# Altium PCB DSP6748_F.PcbDoc (part 11 of 16)
Units mil, origin at the board's own origin, x right, y up, seen from the top; angles counter-clockwise.
Board outline 8188.98 x 4055.12 mil, 4 copper layers (Top Layer, GND, VCC, Bottom Layer); 409 components, 262 nets, 1424 pads, 350 vias.
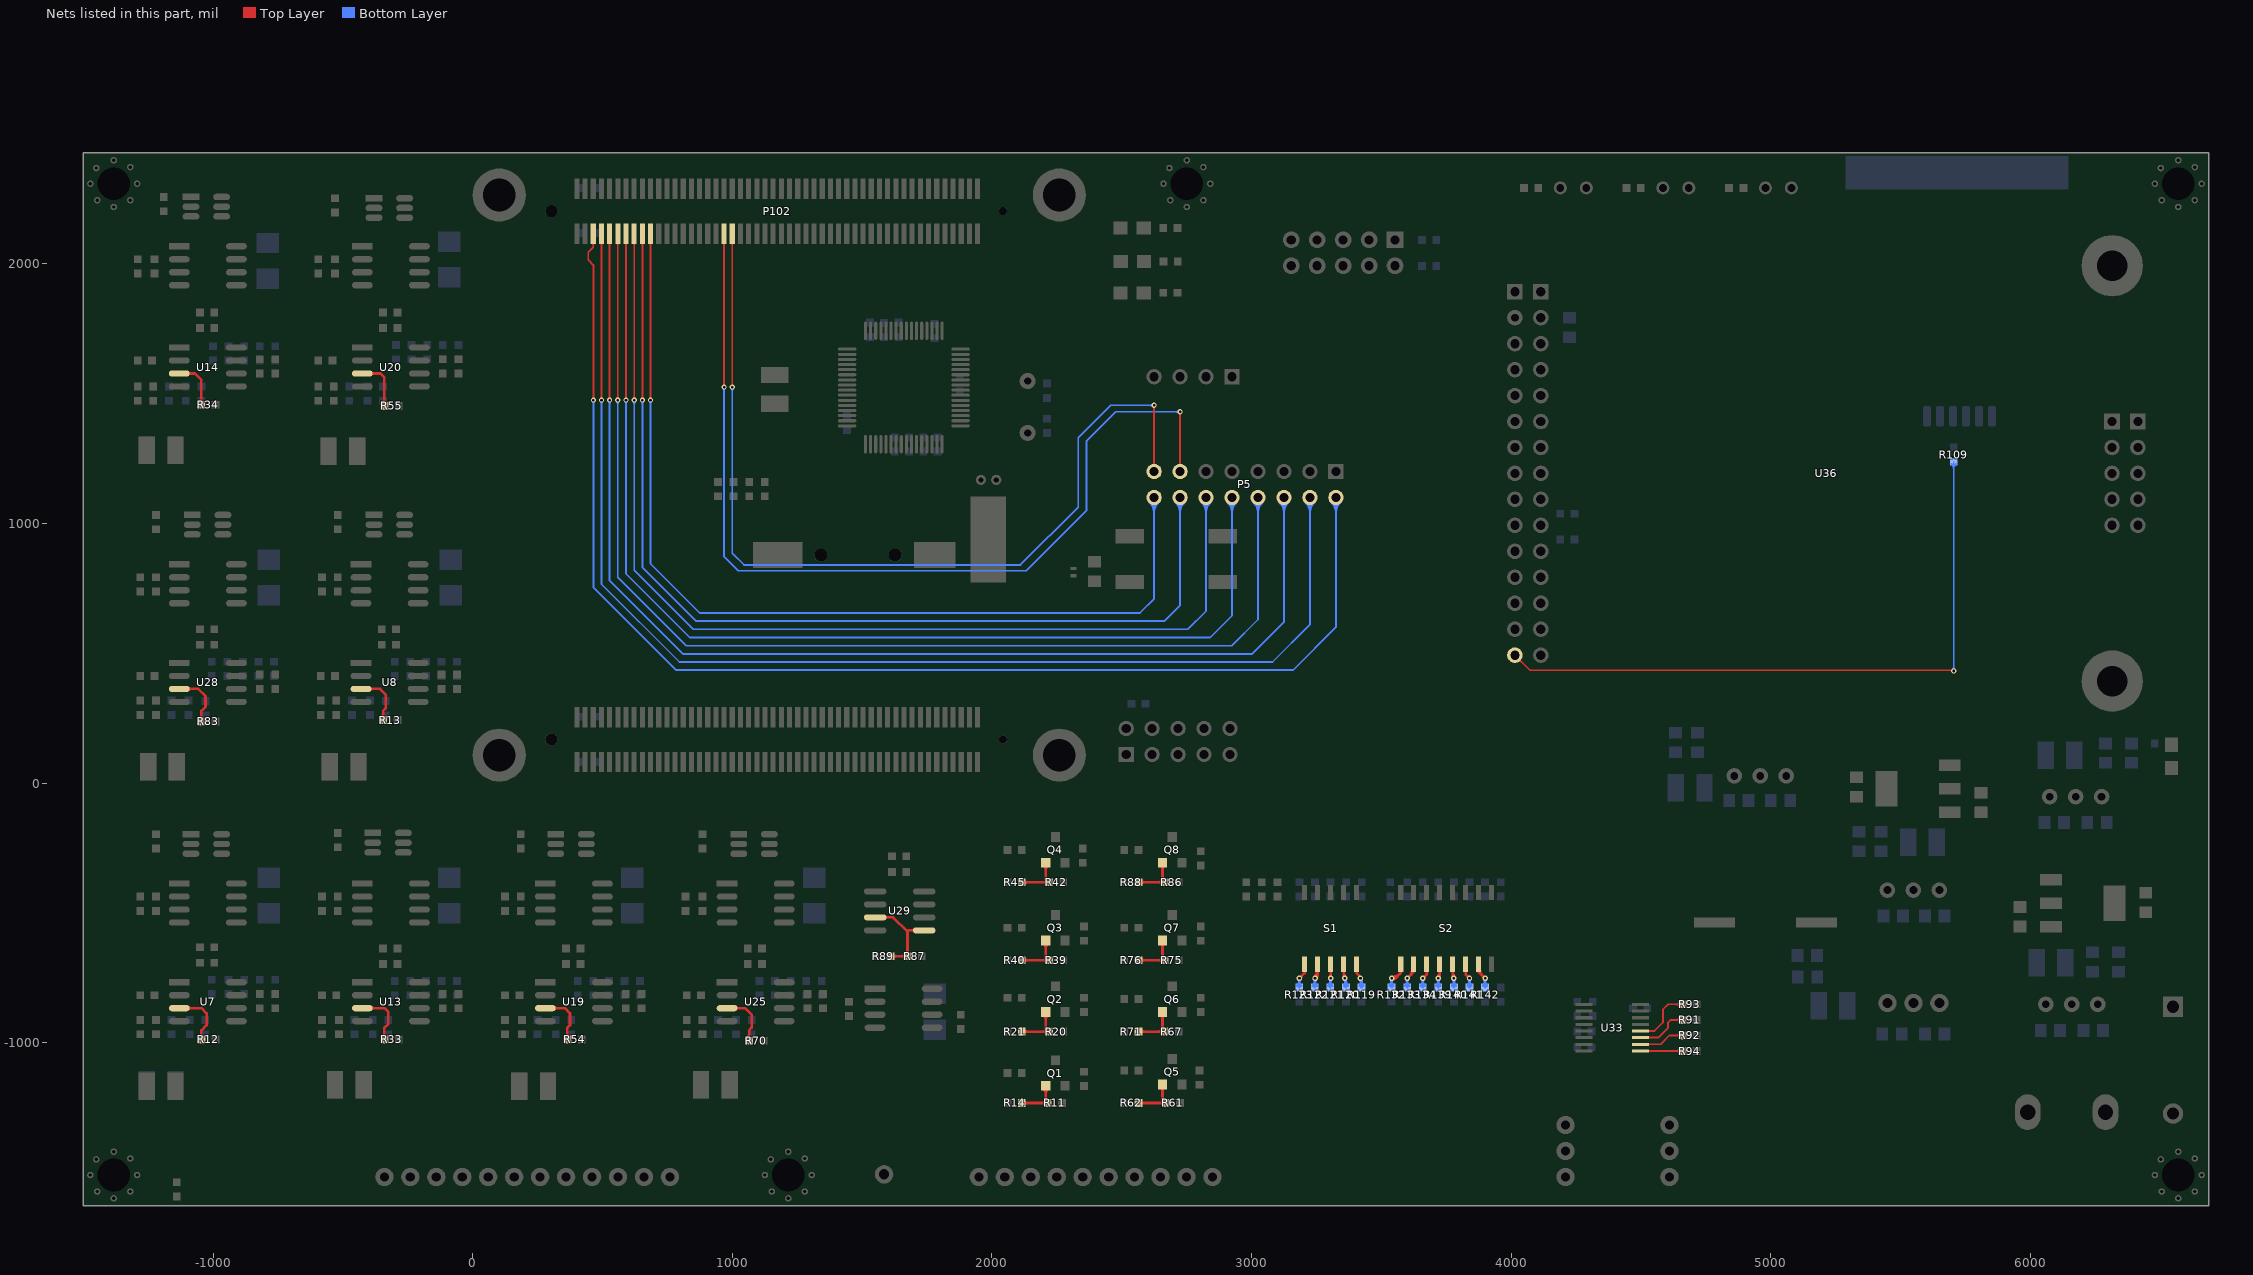
[diagram p13: the nets of this part, all layers, seen from the top]

## Via types
v1: diameter 21, hole 10, Top Layer to Bottom Layer, 244 vias
v2: diameter 20, hole 10, Top Layer to Bottom Layer, 84 vias
v3: diameter 32, hole 16, Top Layer to Bottom Layer, 11 vias
v4: diameter 24, hole 12, Top Layer to Bottom Layer, 7 vias
v5: diameter 39.37, hole 19.68, Top Layer to Bottom Layer, 3 vias
v6: diameter 30, hole 15, Top Layer to Bottom Layer, 1 vias

## Nets (pads, with @x,y where several pads share a name; then routed paths per layer and width w, separated by ;. In a path a pad name is that pad's centre, name@x,y a point inside that pad or via, vN(x,y) a via of type N, cw(c..) or ccw(c..) an arc to the next point about the centre after c; other vN are vias at no path point) (continued)
NetP5_7: P5.7 P102.37 | length 3760.8
  Top Layer w7: v2@963.91,1529.6 ccw(c952.82,1540.69) 968.51,1540.69 ccw(c984.2,1540.69) v2@973.11,1529.6 ; P102.37@964.02,2081.9 cw(c953.19,2071.07) 968.51,2071.07 cw(c983.83,2071.07) P102.37@973,2081.9 ; v2(968.51,1525) P102.37@968.51,2115.91 ; P5.7@2725,1200 v2(2725,1430)
  Bottom Layer w7: v2@963.91,1520.4 cw(c952.82,1509.31) 968.51,1509.31 cw(c984.2,1509.31) v2@973.11,1520.4 ; v2(968.51,1525) 968.51,871.96 1022.73,817.73 2132.27,817.73 2364.02,1049.49 2364.02,1316.28 2477.74,1430 v2(2725,1430) ; v2@2720.4,1425.4 ccw(c2709.31,1414.31) 2709.31,1430 ccw(c2709.31,1445.69) v2@2720.4,1434.6
NetP5_8: P5.8 P102.39 | length 3613.9
  Top Layer w7: P102.39@995.51,2081.9 cw(c984.68,2071.07) 1000,2071.07 cw(c1015.32,2071.07) P102.39@1004.49,2081.9 ; v2(1000,1525) P102.39@1000,2115.91 ; P5.8@2625,1200 v2(2625,1455)
  Bottom Layer w7: v2@995.4,1520.4 cw(c984.31,1509.31) 1000,1509.31 cw(c1015.69,1509.31) v2@1004.6,1520.4 ; v2(1000,1525) 1000,885 1045,840 2110,840 2332.53,1062.53 2332.53,1329.32 2458.21,1455 v2(2625,1455) ; v2@2620.4,1450.4 ccw(c2609.31,1439.31) 2609.31,1455 ccw(c2609.31,1470.69) v2@2620.4,1459.6
NetP5_9: P5.9 P102.5 | length 5158.5
  Top Layer w7: P102.5@460.08,2081.9 cw(c449.25,2071.07) 464.57,2071.07 cw(c479.89,2071.07) P102.5@469.06,2081.9 ; P102.5@464.57,2115.91 464.57,2064.57 445,2045 445,2015 465,1995 v2(465,1475)
  Bottom Layer w7: v2@460.4,1470.4 cw(c449.31,1459.31) 465,1459.31 cw(c480.69,1459.31) v2@469.6,1470.4 ; v2(465,1475) 465,753.82 783.82,435 3160,435 3325,600 P5.9@3325,1100 ; P5.9@3306.6,1081.6 cw(c3262.16,1037.16) 3325,1037.16 cw(c3387.84,1037.16) P5.9@3343.4,1081.6 ; P5.9@3311.55,1086.55 cw(c3279.06,1054.06) 3325,1054.06 cw(c3370.94,1054.06) P5.9@3338.45,1086.55
NetP5_10: P5.10 P102.7 | length 4971.9
  Top Layer w7: P102.7@491.57,2081.9 cw(c480.74,2071.07) 496.06,2071.07 cw(c511.38,2071.07) P102.7@500.55,2081.9 ; v2(496.06,1475) P102.7@496.06,2115.91
  Bottom Layer w7: v2@491.46,1470.4 cw(c480.37,1459.31) 496.06,1459.31 cw(c511.75,1459.31) v2@500.66,1470.4 ; v2(496.06,1475) 496.06,766.68 796.68,466.06 3081.06,466.06 3225,610 P5.10@3225,1100 ; P5.10@3206.6,1081.6 cw(c3162.16,1037.16) 3225,1037.16 cw(c3287.84,1037.16) P5.10@3243.4,1081.6 ; P5.10@3211.55,1086.55 cw(c3179.06,1054.06) 3225,1054.06 cw(c3270.94,1054.06) P5.10@3238.45,1086.55
NetP5_11: P5.11 P102.9 | length 4825.4
  Top Layer w7: v2@522.96,1479.6 ccw(c511.87,1490.69) 527.56,1490.69 ccw(c543.25,1490.69) v2@532.16,1479.6 ; P102.9@523.07,2081.9 cw(c512.24,2071.07) 527.56,2071.07 cw(c542.88,2071.07) P102.9@532.05,2081.9 ; v2(527.56,1475) P102.9@527.56,2115.91
  Bottom Layer w7: v2@522.96,1470.4 cw(c511.87,1459.31) 527.56,1459.31 cw(c543.25,1459.31) v2@532.16,1470.4 ; v2(527.56,1475) 527.56,779.73 809.73,497.56 3002.56,497.56 3125,620 P5.11@3125,1100 ; P5.11@3106.6,1081.6 cw(c3062.16,1037.16) 3125,1037.16 cw(c3187.84,1037.16) P5.11@3143.4,1081.6 ; P5.11@3111.55,1086.55 cw(c3079.06,1054.06) 3125,1054.06 cw(c3170.94,1054.06) P5.11@3138.45,1086.55
NetP5_12: P5.12 P102.11 | length 4654.3
  Top Layer w7: v2@554.46,1479.6 ccw(c543.37,1490.69) 559.06,1490.69 ccw(c574.75,1490.69) v2@563.66,1479.6 ; P102.11@554.57,2081.9 cw(c543.74,2071.07) 559.06,2071.07 cw(c574.38,2071.07) P102.11@563.55,2081.9 ; v2(559.06,1475) P102.11@559.06,2115.91
  Bottom Layer w7: v2@554.46,1470.4 cw(c543.37,1459.31) 559.06,1459.31 cw(c574.75,1459.31) v2@563.66,1470.4 ; v2(559.06,1475) 559.06,792.78 822.78,529.06 2924.06,529.06 3025,630 P5.12@3025,1100 ; P5.12@3006.6,1081.6 cw(c2962.16,1037.16) 3025,1037.16 cw(c3087.84,1037.16) P5.12@3043.4,1081.6 ; P5.12@3011.55,1086.55 cw(c2979.06,1054.06) 3025,1054.06 cw(c3070.94,1054.06) P5.12@3038.45,1086.55
NetP5_13: P5.13 P102.13 | length 4480.3
  Top Layer w7: v2@585.95,1479.6 ccw(c574.86,1490.69) 590.55,1490.69 ccw(c606.24,1490.69) v2@595.15,1479.6 ; P102.13@586.06,2081.9 cw(c575.23,2071.07) 590.55,2071.07 cw(c605.87,2071.07) P102.13@595.04,2081.9 ; v2(590.55,1475) P102.13@590.55,2115.91
  Bottom Layer w7: v2@585.95,1470.4 cw(c574.86,1459.31) 590.55,1459.31 cw(c606.24,1459.31) v2@595.15,1470.4 ; v2(590.55,1475) 590.55,805.82 835.82,560.55 2840.55,560.55 2925,645 P5.13@2925,1100 ; P5.13@2906.6,1081.6 cw(c2862.16,1037.16) 2925,1037.16 cw(c2987.84,1037.16) P5.13@2943.4,1081.6 ; P5.13@2911.55,1086.55 cw(c2879.06,1054.06) 2925,1054.06 cw(c2970.94,1054.06) P5.13@2938.45,1086.55
NetP5_14: P5.14 P102.15 | length 4304.8
  Top Layer w7: v2@617.45,1479.6 ccw(c606.36,1490.69) 622.05,1490.69 ccw(c637.74,1490.69) v2@626.65,1479.6 ; P102.15@617.56,2081.9 cw(c606.73,2071.07) 622.05,2071.07 cw(c637.37,2071.07) P102.15@626.54,2081.9 ; v2(622.05,1475) P102.15@622.05,2115.91
  Bottom Layer w7: v2@617.45,1470.4 cw(c606.36,1459.31) 622.05,1459.31 cw(c637.74,1459.31) v2@626.65,1470.4 ; v2(622.05,1475) 622.05,818.87 848.87,592.05 2754.53,592.05 2825,662.52 P5.14@2825,1100 ; P5.14@2806.6,1081.6 cw(c2762.16,1037.16) 2825,1037.16 cw(c2887.84,1037.16) P5.14@2843.4,1081.6 ; P5.14@2811.55,1086.55 cw(c2779.06,1054.06) 2825,1054.06 cw(c2870.94,1054.06) P5.14@2838.45,1086.55
NetP5_15: P5.15 P102.17 | length 4126.4
  Top Layer w7: v2@648.94,1479.6 ccw(c637.85,1490.69) 653.54,1490.69 ccw(c669.23,1490.69) v2@658.14,1479.6 ; P102.17@649.05,2081.9 cw(c638.22,2071.07) 653.54,2071.07 cw(c668.86,2071.07) P102.17@658.03,2081.9 ; v2(653.54,1475) P102.17@653.54,2115.91
  Bottom Layer w7: v2@648.94,1470.4 cw(c637.85,1459.31) 653.54,1459.31 cw(c669.23,1459.31) v2@658.14,1470.4 ; v2(653.54,1475) 653.54,831.91 861.91,623.54 2663.54,623.54 2725,685 P5.15@2725,1100 ; P5.15@2706.6,1081.6 cw(c2662.16,1037.16) 2725,1037.16 cw(c2787.84,1037.16) P5.15@2743.4,1081.6 ; P5.15@2711.55,1086.55 cw(c2679.06,1054.06) 2725,1054.06 cw(c2770.94,1054.06) P5.15@2738.45,1086.55
NetP5_16: P5.16 P102.19 | length 3921.9
  Top Layer w7: P102.19@680.55,2081.9 cw(c669.72,2071.07) 685.04,2071.07 cw(c700.36,2071.07) P102.19@689.53,2081.9 ; v2(685.04,1475) P102.19@685.04,2115.91
  Bottom Layer w7: v2@680.44,1470.4 cw(c669.35,1459.31) 685.04,1459.31 cw(c700.73,1459.31) v2@689.64,1470.4 ; v2(685.04,1475) 685.04,844.96 874.96,655.04 2570.04,655.04 2625,710 P5.16@2625,1100 ; P5.16@2606.6,1081.6 cw(c2562.16,1037.16) 2625,1037.16 cw(c2687.84,1037.16) P5.16@2643.4,1081.6 ; P5.16@2611.55,1086.55 cw(c2579.06,1054.06) 2625,1054.06 cw(c2670.94,1054.06) P5.16@2638.45,1086.55
NetQ1_1: Q1.1 R11.1 R14.2 | length 541.1
  Top Layer w10: R14.2@2114.81,-1232.48 R11.1@2214.81,-1232.48 2207.41,-1225.08 Q1.1@2207.41,-1166.69 ; R14.2@2121.88,-1239.55 cw(c2138.95,-1256.62) 2138.95,-1232.48 ; R14.2@2121.88,-1239.55 cw(c2138.95,-1256.62) 2138.95,-1232.48 ; R14.2@2121.88,-1239.55 cw(c2138.95,-1256.62) 2138.95,-1232.48 ; R14.2@2121.88,-1225.41 ccw(c2138.95,-1208.34) 2138.95,-1232.48 ; R14.2@2121.88,-1225.41 ccw(c2138.95,-1208.34) 2138.95,-1232.48 ; R14.2@2121.88,-1225.41 ccw(c2138.95,-1208.34) 2138.95,-1232.48 ; 2190.67,-1232.48 cw(c2190.67,-1256.62) R11.1@2207.74,-1239.55 ; 2190.67,-1232.48 ccw(c2190.67,-1208.34) R11.1@2207.74,-1225.41 ; 2190.67,-1232.48 cw(c2190.67,-1256.62) R11.1@2207.74,-1239.55 ; 2190.67,-1232.48 ccw(c2190.67,-1208.34) R11.1@2207.74,-1225.41 ; 2190.67,-1232.48 ccw(c2190.67,-1208.34) R11.1@2207.74,-1225.41 ; 2190.67,-1232.48 cw(c2190.67,-1256.62) R11.1@2207.74,-1239.55 ; Q1.1@2198.42,-1176.67 cw(c2176.71,-1198.38) 2207.41,-1198.38 ; Q1.1@2198.42,-1176.67 cw(c2176.71,-1198.38) 2207.41,-1198.38 ; Q1.1@2198.42,-1176.67 cw(c2176.71,-1198.38) 2207.41,-1198.38 ; 2207.41,-1198.38 cw(c2238.11,-1198.38) Q1.1@2216.4,-1176.67 ; 2207.41,-1198.38 cw(c2238.11,-1198.38) Q1.1@2216.4,-1176.67 ; 2207.41,-1198.38 cw(c2238.11,-1198.38) Q1.1@2216.4,-1176.67
NetQ2_1: Q2.1 R20.1 R21.2 | length 558.1
  Top Layer w10: R21.2@2114.81,-957.48 R20.1@2219.81,-957.48 2207.41,-945.08 Q2.1@2207.41,-881.69 ; R21.2@2121.88,-964.55 cw(c2138.95,-981.62) 2138.95,-957.48 ; R21.2@2121.88,-964.55 cw(c2138.95,-981.62) 2138.95,-957.48 ; R21.2@2121.88,-964.55 cw(c2138.95,-981.62) 2138.95,-957.48 ; R21.2@2121.88,-950.41 ccw(c2138.95,-933.34) 2138.95,-957.48 ; R21.2@2121.88,-950.41 ccw(c2138.95,-933.34) 2138.95,-957.48 ; R21.2@2121.88,-950.41 ccw(c2138.95,-933.34) 2138.95,-957.48 ; 2195.67,-957.48 cw(c2195.67,-981.62) R20.1@2212.74,-964.55 ; 2195.67,-957.48 ccw(c2195.67,-933.34) R20.1@2212.74,-950.41 ; 2195.67,-957.48 cw(c2195.67,-981.62) R20.1@2212.74,-964.55 ; 2195.67,-957.48 ccw(c2195.67,-933.34) R20.1@2212.74,-950.41 ; 2195.67,-957.48 ccw(c2195.67,-933.34) R20.1@2212.74,-950.41 ; 2195.67,-957.48 cw(c2195.67,-981.62) R20.1@2212.74,-964.55 ; Q2.1@2198.42,-891.67 cw(c2176.71,-913.38) 2207.41,-913.38 ; Q2.1@2198.42,-891.67 cw(c2176.71,-913.38) 2207.41,-913.38 ; Q2.1@2198.42,-891.67 cw(c2176.71,-913.38) 2207.41,-913.38 ; 2207.41,-913.38 cw(c2238.11,-913.38) Q2.1@2216.4,-891.67 ; 2207.41,-913.38 cw(c2238.11,-913.38) Q2.1@2216.4,-891.67 ; 2207.41,-913.38 cw(c2238.11,-913.38) Q2.1@2216.4,-891.67
NetQ3_1: Q3.1 R39.1 R40.2 | length 558.1
  Top Layer w10: R40.2@2114.81,-682.48 R39.1@2219.81,-682.48 2207.41,-670.08 Q3.1@2207.41,-606.69 ; R40.2@2121.88,-689.55 cw(c2138.95,-706.62) 2138.95,-682.48 ; R40.2@2121.88,-689.55 cw(c2138.95,-706.62) 2138.95,-682.48 ; R40.2@2121.88,-689.55 cw(c2138.95,-706.62) 2138.95,-682.48 ; R40.2@2121.88,-675.41 ccw(c2138.95,-658.34) 2138.95,-682.48 ; R40.2@2121.88,-675.41 ccw(c2138.95,-658.34) 2138.95,-682.48 ; R40.2@2121.88,-675.41 ccw(c2138.95,-658.34) 2138.95,-682.48 ; 2195.67,-682.48 cw(c2195.67,-706.62) R39.1@2212.74,-689.55 ; 2195.67,-682.48 ccw(c2195.67,-658.34) R39.1@2212.74,-675.41 ; 2195.67,-682.48 cw(c2195.67,-706.62) R39.1@2212.74,-689.55 ; 2195.67,-682.48 ccw(c2195.67,-658.34) R39.1@2212.74,-675.41 ; 2195.67,-682.48 ccw(c2195.67,-658.34) R39.1@2212.74,-675.41 ; 2195.67,-682.48 cw(c2195.67,-706.62) R39.1@2212.74,-689.55 ; Q3.1@2198.42,-616.67 cw(c2176.71,-638.38) 2207.41,-638.38 ; Q3.1@2198.42,-616.67 cw(c2176.71,-638.38) 2207.41,-638.38 ; Q3.1@2198.42,-616.67 cw(c2176.71,-638.38) 2207.41,-638.38 ; 2207.41,-638.38 cw(c2238.11,-638.38) Q3.1@2216.4,-616.67 ; 2207.41,-638.38 cw(c2238.11,-638.38) Q3.1@2216.4,-616.67 ; 2207.41,-638.38 cw(c2238.11,-638.38) Q3.1@2216.4,-616.67
NetQ4_1: Q4.1 R42.1 R45.2 | length 558.1
  Top Layer w10: R45.2@2114.81,-382.48 R42.1@2219.81,-382.48 2207.41,-370.08 Q4.1@2207.41,-306.69 ; R45.2@2121.88,-389.55 cw(c2138.95,-406.62) 2138.95,-382.48 ; R45.2@2121.88,-389.55 cw(c2138.95,-406.62) 2138.95,-382.48 ; R45.2@2121.88,-389.55 cw(c2138.95,-406.62) 2138.95,-382.48 ; R45.2@2121.88,-375.41 ccw(c2138.95,-358.34) 2138.95,-382.48 ; R45.2@2121.88,-375.41 ccw(c2138.95,-358.34) 2138.95,-382.48 ; R45.2@2121.88,-375.41 ccw(c2138.95,-358.34) 2138.95,-382.48 ; 2195.67,-382.48 cw(c2195.67,-406.62) R42.1@2212.74,-389.55 ; 2195.67,-382.48 ccw(c2195.67,-358.34) R42.1@2212.74,-375.41 ; 2195.67,-382.48 cw(c2195.67,-406.62) R42.1@2212.74,-389.55 ; 2195.67,-382.48 ccw(c2195.67,-358.34) R42.1@2212.74,-375.41 ; 2195.67,-382.48 ccw(c2195.67,-358.34) R42.1@2212.74,-375.41 ; 2195.67,-382.48 cw(c2195.67,-406.62) R42.1@2212.74,-389.55 ; Q4.1@2198.42,-316.67 cw(c2176.71,-338.38) 2207.41,-338.38 ; Q4.1@2198.42,-316.67 cw(c2176.71,-338.38) 2207.41,-338.38 ; Q4.1@2198.42,-316.67 cw(c2176.71,-338.38) 2207.41,-338.38 ; 2207.41,-338.38 cw(c2238.11,-338.38) Q4.1@2216.4,-316.67 ; 2207.41,-338.38 cw(c2238.11,-338.38) Q4.1@2216.4,-316.67 ; 2207.41,-338.38 cw(c2238.11,-338.38) Q4.1@2216.4,-316.67
NetQ5_1: Q5.1 R61.1 R62.2 | length 553.1
  Top Layer w10: R62.2@2564.81,-1232.48 R61.1@2669.81,-1232.48 2657.41,-1220.08 Q5.1@2657.41,-1161.69 ; R62.2@2571.88,-1239.55 cw(c2588.95,-1256.62) 2588.95,-1232.48 ; R62.2@2571.88,-1239.55 cw(c2588.95,-1256.62) 2588.95,-1232.48 ; R62.2@2571.88,-1239.55 cw(c2588.95,-1256.62) 2588.95,-1232.48 ; R62.2@2571.88,-1225.41 ccw(c2588.95,-1208.34) 2588.95,-1232.48 ; R62.2@2571.88,-1225.41 ccw(c2588.95,-1208.34) 2588.95,-1232.48 ; R62.2@2571.88,-1225.41 ccw(c2588.95,-1208.34) 2588.95,-1232.48 ; 2645.67,-1232.48 cw(c2645.67,-1256.62) R61.1@2662.74,-1239.55 ; 2645.67,-1232.48 ccw(c2645.67,-1208.34) R61.1@2662.74,-1225.41 ; 2645.67,-1232.48 cw(c2645.67,-1256.62) R61.1@2662.74,-1239.55 ; 2645.67,-1232.48 ccw(c2645.67,-1208.34) R61.1@2662.74,-1225.41 ; 2645.67,-1232.48 ccw(c2645.67,-1208.34) R61.1@2662.74,-1225.41 ; 2645.67,-1232.48 cw(c2645.67,-1256.62) R61.1@2662.74,-1239.55 ; Q5.1@2648.42,-1171.67 cw(c2626.71,-1193.38) 2657.41,-1193.38 ; Q5.1@2648.42,-1171.67 cw(c2626.71,-1193.38) 2657.41,-1193.38 ; Q5.1@2648.42,-1171.67 cw(c2626.71,-1193.38) 2657.41,-1193.38 ; 2657.41,-1193.38 cw(c2688.11,-1193.38) Q5.1@2666.4,-1171.67 ; 2657.41,-1193.38 cw(c2688.11,-1193.38) Q5.1@2666.4,-1171.67 ; 2657.41,-1193.38 cw(c2688.11,-1193.38) Q5.1@2666.4,-1171.67
NetQ6_1: Q6.1 R67.1 R71.2 | length 546.1
  Top Layer w10: R71.2@2564.81,-957.48 R67.1@2664.81,-957.48 2657.41,-950.08 Q6.1@2657.41,-886.69 ; R71.2@2571.88,-964.55 cw(c2588.95,-981.62) 2588.95,-957.48 ; R71.2@2571.88,-964.55 cw(c2588.95,-981.62) 2588.95,-957.48 ; R71.2@2571.88,-964.55 cw(c2588.95,-981.62) 2588.95,-957.48 ; R71.2@2571.88,-950.41 ccw(c2588.95,-933.34) 2588.95,-957.48 ; R71.2@2571.88,-950.41 ccw(c2588.95,-933.34) 2588.95,-957.48 ; R71.2@2571.88,-950.41 ccw(c2588.95,-933.34) 2588.95,-957.48 ; 2640.67,-957.48 cw(c2640.67,-981.62) R67.1@2657.74,-964.55 ; 2640.67,-957.48 ccw(c2640.67,-933.34) R67.1@2657.74,-950.41 ; 2640.67,-957.48 cw(c2640.67,-981.62) R67.1@2657.74,-964.55 ; 2640.67,-957.48 ccw(c2640.67,-933.34) R67.1@2657.74,-950.41 ; 2640.67,-957.48 ccw(c2640.67,-933.34) R67.1@2657.74,-950.41 ; 2640.67,-957.48 cw(c2640.67,-981.62) R67.1@2657.74,-964.55 ; Q6.1@2648.42,-891.67 cw(c2626.71,-913.38) 2657.41,-913.38 ; Q6.1@2648.42,-891.67 cw(c2626.71,-913.38) 2657.41,-913.38 ; Q6.1@2648.42,-891.67 cw(c2626.71,-913.38) 2657.41,-913.38 ; 2657.41,-913.38 cw(c2688.11,-913.38) Q6.1@2666.4,-891.67 ; 2657.41,-913.38 cw(c2688.11,-913.38) Q6.1@2666.4,-891.67 ; 2657.41,-913.38 cw(c2688.11,-913.38) Q6.1@2666.4,-891.67
NetQ7_1: Q7.1 R75.1 R76.2 | length 546.1
  Top Layer w10: R76.2@2564.81,-682.48 R75.1@2664.81,-682.48 2657.41,-675.08 Q7.1@2657.41,-611.69 ; R76.2@2571.88,-689.55 cw(c2588.95,-706.62) 2588.95,-682.48 ; R76.2@2571.88,-689.55 cw(c2588.95,-706.62) 2588.95,-682.48 ; R76.2@2571.88,-689.55 cw(c2588.95,-706.62) 2588.95,-682.48 ; R76.2@2571.88,-675.41 ccw(c2588.95,-658.34) 2588.95,-682.48 ; R76.2@2571.88,-675.41 ccw(c2588.95,-658.34) 2588.95,-682.48 ; R76.2@2571.88,-675.41 ccw(c2588.95,-658.34) 2588.95,-682.48 ; 2640.67,-682.48 cw(c2640.67,-706.62) R75.1@2657.74,-689.55 ; 2640.67,-682.48 ccw(c2640.67,-658.34) R75.1@2657.74,-675.41 ; 2640.67,-682.48 cw(c2640.67,-706.62) R75.1@2657.74,-689.55 ; 2640.67,-682.48 ccw(c2640.67,-658.34) R75.1@2657.74,-675.41 ; 2640.67,-682.48 ccw(c2640.67,-658.34) R75.1@2657.74,-675.41 ; 2640.67,-682.48 cw(c2640.67,-706.62) R75.1@2657.74,-689.55 ; Q7.1@2648.42,-616.67 cw(c2626.71,-638.38) 2657.41,-638.38 ; Q7.1@2648.42,-616.67 cw(c2626.71,-638.38) 2657.41,-638.38 ; Q7.1@2648.42,-616.67 cw(c2626.71,-638.38) 2657.41,-638.38 ; 2657.41,-638.38 cw(c2688.11,-638.38) Q7.1@2666.4,-616.67 ; 2657.41,-638.38 cw(c2688.11,-638.38) Q7.1@2666.4,-616.67 ; 2657.41,-638.38 cw(c2688.11,-638.38) Q7.1@2666.4,-616.67
NetQ8_1: Q8.1 R86.1 R88.2 | length 541.1
  Top Layer w10: R88.2@2564.81,-382.48 R86.1@2664.81,-382.48 2657.41,-375.08 Q8.1@2657.41,-316.69 ; R88.2@2571.88,-389.55 cw(c2588.95,-406.62) 2588.95,-382.48 ; R88.2@2571.88,-389.55 cw(c2588.95,-406.62) 2588.95,-382.48 ; R88.2@2571.88,-389.55 cw(c2588.95,-406.62) 2588.95,-382.48 ; R88.2@2571.88,-375.41 ccw(c2588.95,-358.34) 2588.95,-382.48 ; R88.2@2571.88,-375.41 ccw(c2588.95,-358.34) 2588.95,-382.48 ; R88.2@2571.88,-375.41 ccw(c2588.95,-358.34) 2588.95,-382.48 ; 2640.67,-382.48 cw(c2640.67,-406.62) R86.1@2657.74,-389.55 ; 2640.67,-382.48 ccw(c2640.67,-358.34) R86.1@2657.74,-375.41 ; 2640.67,-382.48 cw(c2640.67,-406.62) R86.1@2657.74,-389.55 ; 2640.67,-382.48 ccw(c2640.67,-358.34) R86.1@2657.74,-375.41 ; 2640.67,-382.48 ccw(c2640.67,-358.34) R86.1@2657.74,-375.41 ; 2640.67,-382.48 cw(c2640.67,-406.62) R86.1@2657.74,-389.55 ; Q8.1@2648.42,-316.67 cw(c2626.71,-338.38) 2657.41,-338.38 ; Q8.1@2648.42,-316.67 cw(c2626.71,-338.38) 2657.41,-338.38 ; Q8.1@2648.42,-316.67 cw(c2626.71,-338.38) 2657.41,-338.38 ; 2657.41,-338.38 cw(c2688.11,-338.38) Q8.1@2666.4,-316.67 ; 2657.41,-338.38 cw(c2688.11,-338.38) Q8.1@2666.4,-316.67 ; 2657.41,-338.38 cw(c2688.11,-338.38) Q8.1@2666.4,-316.67
NetR12_2: R12.2 U7.3 | length 415
  Top Layer w10: U7.3@-1130.19,-867.48 -1045.19,-867.48 -1025.19,-887.48 -1025.19,-932.48 -1045.19,-952.48 R12.2@-1045.19,-987.48 ; U7.3@-1097.24,-872.43 cw(c-1085.29,-884.38) -1085.29,-867.48 ; U7.3@-1097.24,-872.43 cw(c-1085.29,-884.38) -1085.29,-867.48 ; U7.3@-1097.24,-872.43 cw(c-1085.29,-884.38) -1085.29,-867.48 ; U7.3@-1097.24,-862.53 ccw(c-1085.29,-850.58) -1085.29,-867.48 ; U7.3@-1097.24,-862.53 ccw(c-1085.29,-850.58) -1085.29,-867.48 ; U7.3@-1097.24,-862.53 ccw(c-1085.29,-850.58) -1085.29,-867.48 ; R12.2@-1052.26,-980.41 ccw(c-1069.33,-963.34) -1045.19,-963.34 ; R12.2@-1052.26,-980.41 ccw(c-1069.33,-963.34) -1045.19,-963.34 ; R12.2@-1052.26,-980.41 ccw(c-1069.33,-963.34) -1045.19,-963.34 ; -1045.19,-963.34 ccw(c-1021.05,-963.34) R12.2@-1038.12,-980.41 ; -1045.19,-963.34 ccw(c-1021.05,-963.34) R12.2@-1038.12,-980.41 ; -1045.19,-963.34 ccw(c-1021.05,-963.34) R12.2@-1038.12,-980.41
NetR13_2: R13.2 U8.3 | length 399.7
  Top Layer w10: U8.3@-430.19,362.52 -357.19,362.52 -335.19,340.52 -335.19,287.52 -345.19,277.52 R13.2@-345.19,242.52 ; U8.3@-397.24,357.57 cw(c-385.29,345.62) -385.29,362.52 ; U8.3@-397.24,357.57 cw(c-385.29,345.62) -385.29,362.52 ; U8.3@-397.24,357.57 cw(c-385.29,345.62) -385.29,362.52 ; U8.3@-397.24,367.47 ccw(c-385.29,379.42) -385.29,362.52 ; U8.3@-397.24,367.47 ccw(c-385.29,379.42) -385.29,362.52 ; U8.3@-397.24,367.47 ccw(c-385.29,379.42) -385.29,362.52 ; R13.2@-352.26,249.59 ccw(c-369.33,266.66) -345.19,266.66 ; R13.2@-352.26,249.59 ccw(c-369.33,266.66) -345.19,266.66 ; R13.2@-352.26,249.59 ccw(c-369.33,266.66) -345.19,266.66 ; -345.19,266.66 ccw(c-321.05,266.66) R13.2@-338.12,249.59 ; -345.19,266.66 ccw(c-321.05,266.66) R13.2@-338.12,249.59 ; -345.19,266.66 ccw(c-321.05,266.66) R13.2@-338.12,249.59
NetR33_2: R33.2 U13.3 | length 410.8
  Top Layer w10: U13.3@-425.19,-867.48 -340.19,-867.48 -325.19,-882.48 -325.19,-927.48 -340.19,-942.48 R33.2@-340.19,-987.48 ; U13.3@-392.24,-872.43 cw(c-380.29,-884.38) -380.29,-867.48 ; U13.3@-392.24,-872.43 cw(c-380.29,-884.38) -380.29,-867.48 ; U13.3@-392.24,-872.43 cw(c-380.29,-884.38) -380.29,-867.48 ; U13.3@-392.24,-862.53 ccw(c-380.29,-850.58) -380.29,-867.48 ; U13.3@-392.24,-862.53 ccw(c-380.29,-850.58) -380.29,-867.48 ; U13.3@-392.24,-862.53 ccw(c-380.29,-850.58) -380.29,-867.48 ; R33.2@-347.26,-980.41 ccw(c-364.33,-963.34) -340.19,-963.34 ; R33.2@-347.26,-980.41 ccw(c-364.33,-963.34) -340.19,-963.34 ; R33.2@-347.26,-980.41 ccw(c-364.33,-963.34) -340.19,-963.34 ; -340.19,-963.34 ccw(c-316.05,-963.34) R33.2@-333.12,-980.41 ; -340.19,-963.34 ccw(c-316.05,-963.34) R33.2@-333.12,-980.41 ; -340.19,-963.34 ccw(c-316.05,-963.34) R33.2@-333.12,-980.41
NetR34_2: R34.2 U14.3 | length 383.8
  Top Layer w10: U14.3@-1130.19,1577.52 -1070.19,1577.52 -1045.19,1552.52 R34.2@-1045.19,1457.52 ; U14.3@-1097.24,1572.57 cw(c-1085.29,1560.62) -1085.29,1577.52 ; U14.3@-1097.24,1572.57 cw(c-1085.29,1560.62) -1085.29,1577.52 ; U14.3@-1097.24,1572.57 cw(c-1085.29,1560.62) -1085.29,1577.52 ; U14.3@-1097.24,1582.47 ccw(c-1085.29,1594.42) -1085.29,1577.52 ; U14.3@-1097.24,1582.47 ccw(c-1085.29,1594.42) -1085.29,1577.52 ; U14.3@-1097.24,1582.47 ccw(c-1085.29,1594.42) -1085.29,1577.52 ; R34.2@-1052.26,1464.59 ccw(c-1069.33,1481.66) -1045.19,1481.66 ; R34.2@-1052.26,1464.59 ccw(c-1069.33,1481.66) -1045.19,1481.66 ; R34.2@-1052.26,1464.59 ccw(c-1069.33,1481.66) -1045.19,1481.66 ; -1045.19,1481.66 ccw(c-1021.05,1481.66) R34.2@-1038.12,1464.59 ; -1045.19,1481.66 ccw(c-1021.05,1481.66) R34.2@-1038.12,1464.59 ; -1045.19,1481.66 ccw(c-1021.05,1481.66) R34.2@-1038.12,1464.59
NetR54_2: R54.2 U19.3 | length 400.8
  Top Layer w10: U19.3@279.81,-867.48 354.81,-867.48 374.81,-887.48 374.81,-932.48 364.81,-942.48 R54.2@364.81,-987.48 ; U19.3@312.76,-872.43 cw(c324.71,-884.38) 324.71,-867.48 ; U19.3@312.76,-872.43 cw(c324.71,-884.38) 324.71,-867.48 ; U19.3@312.76,-872.43 cw(c324.71,-884.38) 324.71,-867.48 ; U19.3@312.76,-862.53 ccw(c324.71,-850.58) 324.71,-867.48 ; U19.3@312.76,-862.53 ccw(c324.71,-850.58) 324.71,-867.48 ; U19.3@312.76,-862.53 ccw(c324.71,-850.58) 324.71,-867.48 ; R54.2@357.74,-980.41 ccw(c340.67,-963.34) 364.81,-963.34 ; R54.2@357.74,-980.41 ccw(c340.67,-963.34) 364.81,-963.34 ; R54.2@357.74,-980.41 ccw(c340.67,-963.34) 364.81,-963.34 ; 364.81,-963.34 ccw(c388.95,-963.34) R54.2@371.88,-980.41 ; 364.81,-963.34 ccw(c388.95,-963.34) R54.2@371.88,-980.41 ; 364.81,-963.34 ccw(c388.95,-963.34) R54.2@371.88,-980.41
NetR55_2: R55.2 U20.3 | length 394.6
  Top Layer w10: U20.3@-425.19,1577.52 -355.19,1577.52 -340.19,1562.52 R55.2@-340.19,1452.52 ; U20.3@-392.24,1572.57 cw(c-380.29,1560.62) -380.29,1577.52 ; U20.3@-392.24,1572.57 cw(c-380.29,1560.62) -380.29,1577.52 ; U20.3@-392.24,1572.57 cw(c-380.29,1560.62) -380.29,1577.52 ; U20.3@-392.24,1582.47 ccw(c-380.29,1594.42) -380.29,1577.52 ; U20.3@-392.24,1582.47 ccw(c-380.29,1594.42) -380.29,1577.52 ; U20.3@-392.24,1582.47 ccw(c-380.29,1594.42) -380.29,1577.52 ; R55.2@-347.26,1459.59 ccw(c-364.33,1476.66) -340.19,1476.66 ; R55.2@-347.26,1459.59 ccw(c-364.33,1476.66) -340.19,1476.66 ; R55.2@-347.26,1459.59 ccw(c-364.33,1476.66) -340.19,1476.66 ; -340.19,1476.66 ccw(c-316.05,1476.66) R55.2@-333.12,1459.59 ; -340.19,1476.66 ccw(c-316.05,1476.66) R55.2@-333.12,1459.59 ; -340.19,1476.66 ccw(c-316.05,1476.66) R55.2@-333.12,1459.59
NetR70_2: R70.2 U25.3 | length 402.9
  Top Layer w10: U25.3@979.81,-867.48 1049.81,-867.48 1074.81,-892.48 1074.81,-942.48 1064.81,-952.48 R70.2@1064.81,-992.48 ; U25.3@1012.76,-872.43 cw(c1024.71,-884.38) 1024.71,-867.48 ; U25.3@1012.76,-872.43 cw(c1024.71,-884.38) 1024.71,-867.48 ; U25.3@1012.76,-872.43 cw(c1024.71,-884.38) 1024.71,-867.48 ; U25.3@1012.76,-862.53 ccw(c1024.71,-850.58) 1024.71,-867.48 ; U25.3@1012.76,-862.53 ccw(c1024.71,-850.58) 1024.71,-867.48 ; U25.3@1012.76,-862.53 ccw(c1024.71,-850.58) 1024.71,-867.48 ; R70.2@1057.74,-985.41 ccw(c1040.67,-968.34) 1064.81,-968.34 ; R70.2@1057.74,-985.41 ccw(c1040.67,-968.34) 1064.81,-968.34 ; R70.2@1057.74,-985.41 ccw(c1040.67,-968.34) 1064.81,-968.34 ; 1064.81,-968.34 ccw(c1088.95,-968.34) R70.2@1071.88,-985.41 ; 1064.81,-968.34 ccw(c1088.95,-968.34) R70.2@1071.88,-985.41 ; 1064.81,-968.34 ccw(c1088.95,-968.34) R70.2@1071.88,-985.41
NetR83_2: R83.2 U28.3 | length 409.6
  Top Layer w10: U28.3@-1130.19,362.52 -1057.19,362.52 -1029.19,334.52 -1029.19,293.52 -1045.19,277.52 R83.2@-1045.19,237.52 ; U28.3@-1097.24,357.57 cw(c-1085.29,345.62) -1085.29,362.52 ; U28.3@-1097.24,357.57 cw(c-1085.29,345.62) -1085.29,362.52 ; U28.3@-1097.24,357.57 cw(c-1085.29,345.62) -1085.29,362.52 ; U28.3@-1097.24,367.47 ccw(c-1085.29,379.42) -1085.29,362.52 ; U28.3@-1097.24,367.47 ccw(c-1085.29,379.42) -1085.29,362.52 ; U28.3@-1097.24,367.47 ccw(c-1085.29,379.42) -1085.29,362.52 ; R83.2@-1052.26,244.59 ccw(c-1069.33,261.66) -1045.19,261.66 ; R83.2@-1052.26,244.59 ccw(c-1069.33,261.66) -1045.19,261.66 ; R83.2@-1052.26,244.59 ccw(c-1069.33,261.66) -1045.19,261.66 ; -1045.19,261.66 ccw(c-1021.05,261.66) R83.2@-1038.12,244.59 ; -1045.19,261.66 ccw(c-1021.05,261.66) R83.2@-1038.12,244.59 ; -1045.19,261.66 ccw(c-1021.05,261.66) R83.2@-1038.12,244.59
NetR87_1: R87.1 R89.2 U29.3 U29.5 | length 870.1
  Top Layer w10: U29.3@1550.32,-517.48 1619.81,-517.48 1674.81,-572.48 ; R89.2@1609.81,-667.48 R87.1@1674.81,-667.48 1674.81,-572.48 ; U29.5@1739.3,-567.48 1679.81,-567.48 1674.81,-572.48 ; U29.3@1586.63,-522.3 cw(c1598.26,-533.92) 1598.26,-517.48 ; U29.3@1586.63,-522.3 cw(c1598.26,-533.92) 1598.26,-517.48 ; U29.3@1586.63,-522.3 cw(c1598.26,-533.92) 1598.26,-517.48 ; U29.3@1586.63,-512.66 ccw(c1598.26,-501.04) 1598.26,-517.48 ; U29.3@1586.63,-512.66 ccw(c1598.26,-501.04) 1598.26,-517.48 ; U29.3@1586.63,-512.66 ccw(c1598.26,-501.04) 1598.26,-517.48 ; R89.2@1616.88,-674.55 cw(c1633.95,-691.62) 1633.95,-667.48 ; R89.2@1616.88,-674.55 cw(c1633.95,-691.62) 1633.95,-667.48 ; R89.2@1616.88,-674.55 cw(c1633.95,-691.62) 1633.95,-667.48 ; R89.2@1616.88,-660.41 ccw(c1633.95,-643.34) 1633.95,-667.48 ; R89.2@1616.88,-660.41 ccw(c1633.95,-643.34) 1633.95,-667.48 ; R89.2@1616.88,-660.41 ccw(c1633.95,-643.34) 1633.95,-667.48 ; 1650.67,-667.48 cw(c1650.67,-691.62) R87.1@1667.74,-674.55 ; 1650.67,-667.48 ccw(c1650.67,-643.34) R87.1@1667.74,-660.41 ; 1650.67,-667.48 cw(c1650.67,-691.62) R87.1@1667.74,-674.55 ; 1650.67,-667.48 ccw(c1650.67,-643.34) R87.1@1667.74,-660.41 ; 1650.67,-667.48 ccw(c1650.67,-643.34) R87.1@1667.74,-660.41 ; 1650.67,-667.48 cw(c1650.67,-691.62) R87.1@1667.74,-674.55 ; R87.1@1667.74,-660.41 ccw(c1650.67,-643.34) 1674.81,-643.34 ; R87.1@1667.74,-660.41 ccw(c1650.67,-643.34) 1674.81,-643.34 ; R87.1@1667.74,-660.41 ccw(c1650.67,-643.34) 1674.81,-643.34 ; 1674.81,-643.34 ccw(c1698.95,-643.34) R87.1@1681.88,-660.41 ; 1674.81,-643.34 ccw(c1698.95,-643.34) R87.1@1681.88,-660.41 ; 1674.81,-643.34 ccw(c1698.95,-643.34) R87.1@1681.88,-660.41 ; 1691.36,-567.48 cw(c1691.36,-583.92) U29.5@1702.99,-572.3 ; 1691.36,-567.48 ccw(c1691.36,-551.04) U29.5@1702.99,-562.66 ; 1691.36,-567.48 cw(c1691.36,-583.92) U29.5@1702.99,-572.3 ; 1691.36,-567.48 ccw(c1691.36,-551.04) U29.5@1702.99,-562.66 ; 1691.36,-567.48 ccw(c1691.36,-551.04) U29.5@1702.99,-562.66 ; 1691.36,-567.48 cw(c1691.36,-583.92) U29.5@1702.99,-572.3
NetR91_2: R91.2 U33.11 | length 331.6
  Top Layer w7: U33.11@4499.06,-980.87 4566.42,-980.87 4604.81,-942.48 4604.81,-922.48 4614.81,-912.48 R91.2@4659.81,-912.48 ; 4632.05,-912.48 cw(c4632.05,-940.24) R91.2@4651.68,-920.61 ; 4632.05,-912.48 ccw(c4632.05,-884.72) R91.2@4651.68,-904.35 ; 4632.05,-912.48 cw(c4632.05,-940.24) R91.2@4651.68,-920.61 ; 4632.05,-912.48 ccw(c4632.05,-884.72) R91.2@4651.68,-904.35 ; 4632.05,-912.48 ccw(c4632.05,-884.72) R91.2@4651.68,-904.35 ; 4632.05,-912.48 cw(c4632.05,-940.24) R91.2@4651.68,-920.61
NetR92_2: R92.2 U33.10 | length 305.7
  Top Layer w7: U33.10@4499.06,-1006.46 4575.83,-1006.46 4609.81,-972.48 R92.2@4659.81,-972.48 ; 4632.05,-972.48 cw(c4632.05,-1000.24) R92.2@4651.68,-980.61 ; 4632.05,-972.48 ccw(c4632.05,-944.72) R92.2@4651.68,-964.35 ; 4632.05,-972.48 cw(c4632.05,-1000.24) R92.2@4651.68,-980.61 ; 4632.05,-972.48 ccw(c4632.05,-944.72) R92.2@4651.68,-964.35 ; 4632.05,-972.48 ccw(c4632.05,-944.72) R92.2@4651.68,-964.35 ; 4632.05,-972.48 cw(c4632.05,-1000.24) R92.2@4651.68,-980.61
NetR93_2: R93.2 U33.12 | length 363.4
  Top Layer w7: U33.12@4499.06,-955.28 4552.01,-955.28 4584.81,-922.48 4584.81,-872.48 4604.81,-852.48 R93.2@4659.81,-852.48 ; 4632.05,-852.48 cw(c4632.05,-880.24) R93.2@4651.68,-860.61 ; 4632.05,-852.48 ccw(c4632.05,-824.72) R93.2@4651.68,-844.35 ; 4632.05,-852.48 cw(c4632.05,-880.24) R93.2@4651.68,-860.61 ; 4632.05,-852.48 ccw(c4632.05,-824.72) R93.2@4651.68,-844.35 ; 4632.05,-852.48 ccw(c4632.05,-824.72) R93.2@4651.68,-844.35 ; 4632.05,-852.48 cw(c4632.05,-880.24) R93.2@4651.68,-860.61
NetR94_2: R94.2 U33.9 | length 291.8
  Top Layer w7: U33.9@4499.06,-1032.05 4659.38,-1032.05 R94.2@4659.81,-1032.48 ; 4631,-1032.05 cw(c4631,-1061.29) R94.2@4651.68,-1040.61 ; 4631,-1032.05 cw(c4631,-1061.29) R94.2@4651.68,-1040.61 ; 4631,-1032.05 cw(c4631,-1061.29) R94.2@4651.68,-1040.61 ; 4633.09,-1032.05 ccw(c4633.09,-1005.76) R94.2@4651.68,-1024.35 ; 4633.09,-1032.05 ccw(c4633.09,-1005.76) R94.2@4651.68,-1024.35 ; 4633.09,-1032.05 ccw(c4633.09,-1005.76) R94.2@4651.68,-1024.35
NetR109_1: R109.1 U36.J1-15 | length 2589.9
  Top Layer w7: U36.J1-15@4014.81,492.52 4072.81,434.52 5702.15,434.52 v2(5705.15,431.52)
  Bottom Layer w7: R109.1@5697.02,1229.39 cw(c5677.39,1209.76) 5705.15,1209.76 cw(c5732.91,1209.76) R109.1@5713.28,1229.39 ; v2@5700.55,436.12 ccw(c5689.46,447.21) 5705.15,447.21 ccw(c5720.84,447.21) v2@5709.75,436.12 ; v2(5705.15,431.52) R109.1@5705.15,1237.52
NetR119_2: R119.2 S1.5 | length 393.5
  Top Layer w10: S1.5@3404.81,-697.48 3404.81,-732.48 3419.81,-747.48 v1(3419.81,-752.48) ; S1.5@3401.39,-720.59 cw(c3393.12,-728.86) 3404.81,-728.86 ; S1.5@3401.39,-720.59 cw(c3393.12,-728.86) 3404.81,-728.86 ; S1.5@3401.39,-720.59 cw(c3393.12,-728.86) 3404.81,-728.86 ; 3404.81,-728.86 cw(c3416.5,-728.86) S1.5@3408.23,-720.59 ; 3404.81,-728.86 cw(c3416.5,-728.86) S1.5@3408.23,-720.59 ; 3404.81,-728.86 cw(c3416.5,-728.86) S1.5@3408.23,-720.59
  Bottom Layer w10: R119.2@3423.81,-787.48 v1@3423.81,-756.48 ; v1@3415.92,-756.37 cw(c3396.87,-775.42) R119.2@3423.81,-775.42 ; v1@3415.92,-756.37 cw(c3396.87,-775.42) R119.2@3423.81,-775.42 ; v1@3415.92,-756.37 cw(c3396.87,-775.42) R119.2@3423.81,-775.42 ; R119.2@3416.74,-780.41 ccw(c3399.67,-763.34) 3423.81,-763.34 ; R119.2@3416.74,-780.41 ccw(c3399.67,-763.34) 3423.81,-763.34 ; R119.2@3416.74,-780.41 ccw(c3399.67,-763.34) 3423.81,-763.34 ; 3423.81,-763.34 ccw(c3447.95,-763.34) R119.2@3430.88,-780.41 ; 3423.81,-763.34 ccw(c3447.95,-763.34) R119.2@3430.88,-780.41 ; 3423.81,-763.34 ccw(c3447.95,-763.34) R119.2@3430.88,-780.41 ; R119.2@3417.52,-779.7 ccw(c3409.92,-770.3) 3421.6,-767.17 cw(c3409.92,-770.3) R119.2@3417.52,-779.7 ; 3421.36,-765.79 cw(c3427.33,-762.34) 3423.15,-756.85 ccw(c3427.33,-762.34) 3421.36,-765.79 ; 3422.53,-770.63 ccw(c3435.55,-767.15) 3428.81,-778.82 cw(c3435.55,-767.15) 3422.53,-770.63
NetR120_2: R120.2 S1.4 | length 488.6
  Top Layer w10: S1.4@3354.81,-697.48 3354.81,-747.48 v1(3359.81,-752.48) ; S1.4@3351.39,-720.59 cw(c3343.12,-728.86) 3354.81,-728.86 ; S1.4@3351.39,-720.59 cw(c3343.12,-728.86) 3354.81,-728.86 ; S1.4@3351.39,-720.59 cw(c3343.12,-728.86) 3354.81,-728.86 ; 3354.81,-728.86 cw(c3366.5,-728.86) S1.4@3358.23,-720.59 ; 3354.81,-728.86 cw(c3366.5,-728.86) S1.4@3358.23,-720.59 ; 3354.81,-728.86 cw(c3366.5,-728.86) S1.4@3358.23,-720.59 ; 3354.81,-727.13 ccw(c3385.16,-727.13) v1@3363.7,-748.59 ; 3354.81,-727.13 ccw(c3385.16,-727.13) v1@3363.7,-748.59 ; 3354.81,-727.13 ccw(c3385.16,-727.13) v1@3363.7,-748.59 ; v1@3355.93,-748.58 ccw(c3349.54,-742.17) 3357.38,-737.64 cw(c3349.54,-742.17) v1@3355.93,-748.58
  Bottom Layer w10: R120.2@3363.81,-787.48 v1@3363.81,-752.48 ; v1@3355.92,-756.37 cw(c3336.87,-775.42) R120.2@3363.81,-775.42 ; v1@3355.92,-756.37 cw(c3336.87,-775.42) R120.2@3363.81,-775.42 ; v1@3355.92,-756.37 cw(c3336.87,-775.42) R120.2@3363.81,-775.42 ; R120.2@3356.74,-780.41 ccw(c3339.67,-763.34) 3363.81,-763.34 ; R120.2@3356.74,-780.41 ccw(c3339.67,-763.34) 3363.81,-763.34 ; R120.2@3356.74,-780.41 ccw(c3339.67,-763.34) 3363.81,-763.34 ; 3363.81,-763.34 ccw(c3387.95,-763.34) R120.2@3370.88,-780.41 ; 3363.81,-763.34 ccw(c3387.95,-763.34) R120.2@3370.88,-780.41 ; 3363.81,-763.34 ccw(c3387.95,-763.34) R120.2@3370.88,-780.41 ; R120.2@3357.52,-779.7 ccw(c3349.92,-770.3) 3361.6,-767.17 cw(c3349.92,-770.3) R120.2@3357.52,-779.7 ; 3361.36,-765.79 cw(c3367.33,-762.34) 3363.15,-756.85 ccw(c3367.33,-762.34) 3361.36,-765.79 ; 3362.53,-770.63 ccw(c3375.55,-767.15) 3368.81,-778.82 cw(c3375.55,-767.15) 3362.53,-770.63
NetR121_2: R121.2 S1.3 | length 383
  Top Layer w10: v1(3304.81,-752.48) S1.3@3304.81,-697.48 ; v1@3300.92,-748.59 ccw(c3291.53,-739.2) 3304.81,-739.2 ; v1@3300.92,-748.59 ccw(c3291.53,-739.2) 3304.81,-739.2 ; v1@3300.92,-748.59 ccw(c3291.53,-739.2) 3304.81,-739.2 ; S1.3@3301.39,-720.59 cw(c3293.12,-728.86) 3304.81,-728.86 ; S1.3@3301.39,-720.59 cw(c3293.12,-728.86) 3304.81,-728.86 ; S1.3@3301.39,-720.59 cw(c3293.12,-728.86) 3304.81,-728.86 ; 3304.81,-739.2 ccw(c3318.09,-739.2) v1@3308.7,-748.59 ; 3304.81,-739.2 ccw(c3318.09,-739.2) v1@3308.7,-748.59 ; 3304.81,-739.2 ccw(c3318.09,-739.2) v1@3308.7,-748.59 ; 3304.81,-728.86 cw(c3316.5,-728.86) S1.3@3308.23,-720.59 ; 3304.81,-728.86 cw(c3316.5,-728.86) S1.3@3308.23,-720.59 ; 3304.81,-728.86 cw(c3316.5,-728.86) S1.3@3308.23,-720.59
  Bottom Layer w10: R121.2@3303.81,-787.48 v1@3303.81,-753.48 ; R121.2@3296.74,-780.41 ccw(c3279.67,-763.34) 3303.81,-763.34 ; R121.2@3296.74,-780.41 ccw(c3279.67,-763.34) 3303.81,-763.34 ; R121.2@3296.74,-780.41 ccw(c3279.67,-763.34) 3303.81,-763.34 ; v1@3300.92,-756.37 cw(c3293.95,-763.34) 3303.81,-763.34 ; v1@3300.92,-756.37 cw(c3293.95,-763.34) 3303.81,-763.34 ; v1@3300.92,-756.37 cw(c3293.95,-763.34) 3303.81,-763.34 ; 3303.81,-768.17 cw(c3320.5,-768.17) v1@3308.7,-756.37 ; 3303.81,-768.17 cw(c3320.5,-768.17) v1@3308.7,-756.37 ; 3303.81,-768.17 cw(c3320.5,-768.17) v1@3308.7,-756.37 ; 3303.81,-763.34 ccw(c3327.95,-763.34) R121.2@3310.88,-780.41 ; 3303.81,-763.34 ccw(c3327.95,-763.34) R121.2@3310.88,-780.41 ; 3303.81,-763.34 ccw(c3327.95,-763.34) R121.2@3310.88,-780.41
NetR122_2: R122.2 S1.2 | length 548.7
  Top Layer w10: v1(3244.81,-752.48) 3254.81,-742.48 S1.2@3254.81,-697.48 ; v1@3244.81,-746.98 ccw(c3244.81,-733.7) 3254.2,-743.09 ccw(c3263.59,-752.48) v1@3250.31,-752.48 ; v1@3240.92,-748.59 ccw(c3207.39,-715.06) S1.2@3254.81,-715.06 ; v1@3240.92,-748.59 ccw(c3207.39,-715.06) S1.2@3254.81,-715.06 ; v1@3240.92,-748.59 ccw(c3207.39,-715.06) S1.2@3254.81,-715.06 ; v1@3247.99,-755.66 ccw(c3231.53,-739.2) 3254.81,-739.2 ; v1@3247.99,-755.66 ccw(c3231.53,-739.2) 3254.81,-739.2 ; v1@3247.99,-755.66 ccw(c3231.53,-739.2) 3254.81,-739.2 ; S1.2@3251.39,-720.59 cw(c3243.12,-728.86) 3254.81,-728.86 ; S1.2@3251.39,-720.59 cw(c3243.12,-728.86) 3254.81,-728.86 ; S1.2@3251.39,-720.59 cw(c3243.12,-728.86) 3254.81,-728.86 ; 3254.81,-728.86 cw(c3266.5,-728.86) S1.2@3258.23,-720.59 ; 3254.81,-728.86 cw(c3266.5,-728.86) S1.2@3258.23,-720.59 ; 3254.81,-728.86 cw(c3266.5,-728.86) S1.2@3258.23,-720.59 ; S1.2@3250.62,-719.59 cw(c3242.1,-724.5) 3251.6,-727.05 ccw(c3242.1,-724.5) S1.2@3250.62,-719.59 ; 3250.92,-729.59 cw(c3264.01,-733.09) 3257.23,-721.36 ccw(c3264.01,-733.09) 3250.92,-729.59
  Bottom Layer w10: R122.2@3243.81,-787.48 v1@3243.81,-753.48 ; R122.2@3236.74,-780.41 ccw(c3219.67,-763.34) 3243.81,-763.34 ; R122.2@3236.74,-780.41 ccw(c3219.67,-763.34) 3243.81,-763.34 ; R122.2@3236.74,-780.41 ccw(c3219.67,-763.34) 3243.81,-763.34 ; v1@3240.92,-756.37 cw(c3233.95,-763.34) 3243.81,-763.34 ; v1@3240.92,-756.37 cw(c3233.95,-763.34) 3243.81,-763.34 ; v1@3240.92,-756.37 cw(c3233.95,-763.34) 3243.81,-763.34 ; 3243.81,-768.17 cw(c3260.5,-768.17) v1@3248.7,-756.37 ; 3243.81,-768.17 cw(c3260.5,-768.17) v1@3248.7,-756.37 ; 3243.81,-768.17 cw(c3260.5,-768.17) v1@3248.7,-756.37 ; 3243.81,-763.34 ccw(c3267.95,-763.34) R122.2@3250.88,-780.41 ; 3243.81,-763.34 ccw(c3267.95,-763.34) R122.2@3250.88,-780.41 ; 3243.81,-763.34 ccw(c3267.95,-763.34) R122.2@3250.88,-780.41
NetR123_2: R123.2 S1.1 | length 349.6
  Top Layer w10: v1(3184.81,-752.48) 3204.81,-732.48 S1.1@3204.81,-697.48 ; v1@3184.81,-746.98 ccw(c3184.81,-733.7) 3194.2,-743.09 ccw(c3203.59,-752.48) v1@3190.31,-752.48 ; S1.1@3201.39,-720.59 cw(c3193.12,-728.86) 3204.81,-728.86 ; S1.1@3201.39,-720.59 cw(c3193.12,-728.86) 3204.81,-728.86 ; S1.1@3201.39,-720.59 cw(c3193.12,-728.86) 3204.81,-728.86 ; 3204.81,-728.86 cw(c3216.5,-728.86) S1.1@3208.23,-720.59 ; 3204.81,-728.86 cw(c3216.5,-728.86) S1.1@3208.23,-720.59 ; 3204.81,-728.86 cw(c3216.5,-728.86) S1.1@3208.23,-720.59
  Bottom Layer w10: R123.2@3183.81,-787.48 v1@3183.81,-753.48 ; R123.2@3176.74,-780.41 ccw(c3159.67,-763.34) 3183.81,-763.34 ; R123.2@3176.74,-780.41 ccw(c3159.67,-763.34) 3183.81,-763.34 ; R123.2@3176.74,-780.41 ccw(c3159.67,-763.34) 3183.81,-763.34 ; v1@3180.92,-756.37 cw(c3173.95,-763.34) 3183.81,-763.34 ; v1@3180.92,-756.37 cw(c3173.95,-763.34) 3183.81,-763.34 ; v1@3180.92,-756.37 cw(c3173.95,-763.34) 3183.81,-763.34 ; 3183.81,-768.17 cw(c3200.5,-768.17) v1@3188.7,-756.37 ; 3183.81,-768.17 cw(c3200.5,-768.17) v1@3188.7,-756.37 ; 3183.81,-768.17 cw(c3200.5,-768.17) v1@3188.7,-756.37 ; 3183.81,-763.34 ccw(c3207.95,-763.34) R123.2@3190.88,-780.41 ; 3183.81,-763.34 ccw(c3207.95,-763.34) R123.2@3190.88,-780.41 ; 3183.81,-763.34 ccw(c3207.95,-763.34) R123.2@3190.88,-780.41
NetR132_2: R132.2 S2.1 | length 541.9
  Top Layer w10: v1(3539.81,-752.48) 3554.81,-752.48 3574.81,-732.48 ; v1@3543.7,-756.37 cw(c3553.09,-765.76) 3553.09,-752.48 cw(c3553.09,-739.2) v1@3543.7,-748.59 ; S2.1@3574.81,-697.48 3574.81,-732.48 ; v1@3539.81,-756.98 ccw(c3539.81,-731.63) 3557.73,-749.56 ; v1@3539.81,-756.98 ccw(c3539.81,-731.63) 3557.73,-749.56 ; v1@3539.81,-756.98 ccw(c3539.81,-731.63) 3557.73,-749.56 ; v1@3539.81,-746.98 ccw(c3539.81,-697.49) 3574.81,-732.48 ; v1@3539.81,-746.98 ccw(c3539.81,-697.49) 3574.81,-732.48 ; v1@3539.81,-746.98 ccw(c3539.81,-697.49) 3574.81,-732.48 ; S2.1@3571.39,-720.59 cw(c3563.12,-728.86) 3574.81,-728.86 ; S2.1@3571.39,-720.59 cw(c3563.12,-728.86) 3574.81,-728.86 ; S2.1@3571.39,-720.59 cw(c3563.12,-728.86) 3574.81,-728.86 ; 3574.81,-728.86 cw(c3586.5,-728.86) S2.1@3578.23,-720.59 ; 3574.81,-728.86 cw(c3586.5,-728.86) S2.1@3578.23,-720.59 ; 3574.81,-728.86 cw(c3586.5,-728.86) S2.1@3578.23,-720.59
  Bottom Layer w10: R132.2@3539.81,-787.48 v1(3539.81,-752.48) ; R132.2@3532.74,-780.41 ccw(c3515.67,-763.34) 3539.81,-763.34 ; R132.2@3532.74,-780.41 ccw(c3515.67,-763.34) 3539.81,-763.34 ; R132.2@3532.74,-780.41 ccw(c3515.67,-763.34) 3539.81,-763.34 ; v1@3535.92,-756.37 cw(c3526.53,-765.76) 3539.81,-765.76 ; v1@3535.92,-756.37 cw(c3526.53,-765.76) 3539.81,-765.76 ; v1@3535.92,-756.37 cw(c3526.53,-765.76) 3539.81,-765.76 ; 3539.81,-765.76 cw(c3553.09,-765.76) v1@3543.7,-756.37 ; 3539.81,-765.76 cw(c3553.09,-765.76) v1@3543.7,-756.37 ; 3539.81,-765.76 cw(c3553.09,-765.76) v1@3543.7,-756.37 ; 3539.81,-763.34 ccw(c3563.95,-763.34) R132.2@3546.88,-780.41 ; 3539.81,-763.34 ccw(c3563.95,-763.34) R132.2@3546.88,-780.41 ; 3539.81,-763.34 ccw(c3563.95,-763.34) R132.2@3546.88,-780.41
NetR133_2: R133.2 S2.2 | length 472.3
  Top Layer w10: v1(3599.81,-752.48) 3624.81,-727.48 ; v1@3599.81,-746.98 ccw(c3599.81,-733.7) 3609.2,-743.09 ccw(c3618.59,-752.48) v1@3605.31,-752.48 ; S2.2@3624.81,-697.48 3624.81,-727.48 ; 3609.25,-743.04 ccw(c3583.37,-717.17) S2.2@3619.97,-717.17 ; 3609.25,-743.04 ccw(c3583.37,-717.17) S2.2@3619.97,-717.17 ; 3609.25,-743.04 ccw(c3583.37,-717.17) S2.2@3619.97,-717.17 ; S2.2@3621.72,-720.89 cw(c3616.25,-727.48) 3624.81,-727.48 ; S2.2@3621.72,-720.89 cw(c3616.25,-727.48) 3624.81,-727.48 ; S2.2@3621.72,-720.89 cw(c3616.25,-727.48) 3624.81,-727.48 ; 3624.81,-727.48 cw(c3633.37,-727.48) S2.2@3627.9,-720.89 ; 3624.81,-727.48 cw(c3633.37,-727.48) S2.2@3627.9,-720.89 ; 3624.81,-727.48 cw(c3633.37,-727.48) S2.2@3627.9,-720.89 ; 3614.34,-738.15 cw(c3641.06,-745.31) 3627.23,-721.36 ccw(c3641.06,-745.31) 3614.34,-738.15
  Bottom Layer w10: R133.2@3599.81,-787.48 v1(3599.81,-752.48) ; R133.2@3592.74,-780.41 ccw(c3575.67,-763.34) 3599.81,-763.34 ; R133.2@3592.74,-780.41 ccw(c3575.67,-763.34) 3599.81,-763.34 ; R133.2@3592.74,-780.41 ccw(c3575.67,-763.34) 3599.81,-763.34 ; v1@3595.92,-756.37 cw(c3586.53,-765.76) 3599.81,-765.76 ; v1@3595.92,-756.37 cw(c3586.53,-765.76) 3599.81,-765.76 ; v1@3595.92,-756.37 cw(c3586.53,-765.76) 3599.81,-765.76 ; 3599.81,-765.76 cw(c3613.09,-765.76) v1@3603.7,-756.37 ; 3599.81,-765.76 cw(c3613.09,-765.76) v1@3603.7,-756.37 ; 3599.81,-765.76 cw(c3613.09,-765.76) v1@3603.7,-756.37 ; 3599.81,-763.34 ccw(c3623.95,-763.34) R133.2@3606.88,-780.41 ; 3599.81,-763.34 ccw(c3623.95,-763.34) R133.2@3606.88,-780.41 ; 3599.81,-763.34 ccw(c3623.95,-763.34) R133.2@3606.88,-780.41
NetR134_2: R134.2 S2.3 | length 348.5
  Top Layer w10: v1(3659.81,-752.48) 3674.81,-737.48 S2.3@3674.81,-697.48 ; v1@3659.81,-746.98 ccw(c3659.81,-733.7) 3669.2,-743.09 ccw(c3678.59,-752.48) v1@3665.31,-752.48 ; S2.3@3671.39,-720.59 cw(c3663.12,-728.86) 3674.81,-728.86 ; S2.3@3671.39,-720.59 cw(c3663.12,-728.86) 3674.81,-728.86 ; S2.3@3671.39,-720.59 cw(c3663.12,-728.86) 3674.81,-728.86 ; 3674.81,-728.86 cw(c3686.5,-728.86) S2.3@3678.23,-720.59 ; 3674.81,-728.86 cw(c3686.5,-728.86) S2.3@3678.23,-720.59 ; 3674.81,-728.86 cw(c3686.5,-728.86) S2.3@3678.23,-720.59
  Bottom Layer w10: R134.2@3659.81,-787.48 v1(3659.81,-752.48) ; R134.2@3652.74,-780.41 ccw(c3635.67,-763.34) 3659.81,-763.34 ; R134.2@3652.74,-780.41 ccw(c3635.67,-763.34) 3659.81,-763.34 ; R134.2@3652.74,-780.41 ccw(c3635.67,-763.34) 3659.81,-763.34 ; v1@3655.92,-756.37 cw(c3646.53,-765.76) 3659.81,-765.76 ; v1@3655.92,-756.37 cw(c3646.53,-765.76) 3659.81,-765.76 ; v1@3655.92,-756.37 cw(c3646.53,-765.76) 3659.81,-765.76 ; 3659.81,-765.76 cw(c3673.09,-765.76) v1@3663.7,-756.37 ; 3659.81,-765.76 cw(c3673.09,-765.76) v1@3663.7,-756.37 ; 3659.81,-765.76 cw(c3673.09,-765.76) v1@3663.7,-756.37 ; 3659.81,-763.34 ccw(c3683.95,-763.34) R134.2@3666.88,-780.41 ; 3659.81,-763.34 ccw(c3683.95,-763.34) R134.2@3666.88,-780.41 ; 3659.81,-763.34 ccw(c3683.95,-763.34) R134.2@3666.88,-780.41
NetR139_2: R139.2 S2.4 | length 418.7
  Top Layer w10: v1(3719.81,-752.48) 3724.81,-747.48 S2.4@3724.81,-697.48 ; v1@3715.92,-748.59 ccw(c3694.46,-727.13) 3724.81,-727.13 ; v1@3715.92,-748.59 ccw(c3694.46,-727.13) 3724.81,-727.13 ; v1@3715.92,-748.59 ccw(c3694.46,-727.13) 3724.81,-727.13 ; S2.4@3721.39,-720.59 cw(c3713.12,-728.86) 3724.81,-728.86 ; S2.4@3721.39,-720.59 cw(c3713.12,-728.86) 3724.81,-728.86 ; S2.4@3721.39,-720.59 cw(c3713.12,-728.86) 3724.81,-728.86 ; 3724.81,-728.86 cw(c3736.5,-728.86) S2.4@3728.23,-720.59 ; 3724.81,-728.86 cw(c3736.5,-728.86) S2.4@3728.23,-720.59 ; 3724.81,-728.86 cw(c3736.5,-728.86) S2.4@3728.23,-720.59 ; 3722.24,-737.64 ccw(c3730.08,-742.17) 3723.69,-748.58 cw(c3730.08,-742.17) 3722.24,-737.64
  Bottom Layer w10: R139.2@3719.81,-787.48 v1(3719.81,-752.48) ; R139.2@3712.74,-780.41 ccw(c3695.67,-763.34) 3719.81,-763.34 ; R139.2@3712.74,-780.41 ccw(c3695.67,-763.34) 3719.81,-763.34 ; R139.2@3712.74,-780.41 ccw(c3695.67,-763.34) 3719.81,-763.34 ; v1@3715.92,-756.37 cw(c3706.53,-765.76) 3719.81,-765.76 ; v1@3715.92,-756.37 cw(c3706.53,-765.76) 3719.81,-765.76 ; v1@3715.92,-756.37 cw(c3706.53,-765.76) 3719.81,-765.76 ; 3719.81,-765.76 cw(c3733.09,-765.76) v1@3723.7,-756.37 ; 3719.81,-765.76 cw(c3733.09,-765.76) v1@3723.7,-756.37 ; 3719.81,-765.76 cw(c3733.09,-765.76) v1@3723.7,-756.37 ; 3719.81,-763.34 ccw(c3743.95,-763.34) R139.2@3726.88,-780.41 ; 3719.81,-763.34 ccw(c3743.95,-763.34) R139.2@3726.88,-780.41 ; 3719.81,-763.34 ccw(c3743.95,-763.34) R139.2@3726.88,-780.41
NetR140_2: R140.2 S2.5 | length 418.7
  Top Layer w10: S2.5@3774.81,-697.48 3774.81,-747.48 v1(3779.81,-752.48) ; S2.5@3771.39,-720.59 cw(c3763.12,-728.86) 3774.81,-728.86 ; S2.5@3771.39,-720.59 cw(c3763.12,-728.86) 3774.81,-728.86 ; S2.5@3771.39,-720.59 cw(c3763.12,-728.86) 3774.81,-728.86 ; 3774.81,-728.86 cw(c3786.5,-728.86) S2.5@3778.23,-720.59 ; 3774.81,-728.86 cw(c3786.5,-728.86) S2.5@3778.23,-720.59 ; 3774.81,-728.86 cw(c3786.5,-728.86) S2.5@3778.23,-720.59 ; 3774.81,-727.13 ccw(c3805.16,-727.13) v1@3783.7,-748.59 ; 3774.81,-727.13 ccw(c3805.16,-727.13) v1@3783.7,-748.59 ; 3774.81,-727.13 ccw(c3805.16,-727.13) v1@3783.7,-748.59 ; v1@3775.93,-748.58 ccw(c3769.54,-742.17) 3777.38,-737.64 cw(c3769.54,-742.17) v1@3775.93,-748.58
  Bottom Layer w10: R140.2@3779.81,-787.48 v1(3779.81,-752.48) ; R140.2@3772.74,-780.41 ccw(c3755.67,-763.34) 3779.81,-763.34 ; R140.2@3772.74,-780.41 ccw(c3755.67,-763.34) 3779.81,-763.34 ; R140.2@3772.74,-780.41 ccw(c3755.67,-763.34) 3779.81,-763.34 ; v1@3775.92,-756.37 cw(c3766.53,-765.76) 3779.81,-765.76 ; v1@3775.92,-756.37 cw(c3766.53,-765.76) 3779.81,-765.76 ; v1@3775.92,-756.37 cw(c3766.53,-765.76) 3779.81,-765.76 ; 3779.81,-765.76 cw(c3793.09,-765.76) v1@3783.7,-756.37 ; 3779.81,-765.76 cw(c3793.09,-765.76) v1@3783.7,-756.37 ; 3779.81,-765.76 cw(c3793.09,-765.76) v1@3783.7,-756.37 ; 3779.81,-763.34 ccw(c3803.95,-763.34) R140.2@3786.88,-780.41 ; 3779.81,-763.34 ccw(c3803.95,-763.34) R140.2@3786.88,-780.41 ; 3779.81,-763.34 ccw(c3803.95,-763.34) R140.2@3786.88,-780.41
NetR141_2: R141.2 S2.6 | length 348.5
  Top Layer w10: S2.6@3824.81,-697.48 3824.81,-737.48 v1(3839.81,-752.48) ; v1@3834.31,-752.48 ccw(c3821.03,-752.48) 3830.42,-743.09 ccw(c3839.81,-733.7) v1@3839.81,-746.98 ; S2.6@3821.39,-720.59 cw(c3813.12,-728.86) 3824.81,-728.86 ; S2.6@3821.39,-720.59 cw(c3813.12,-728.86) 3824.81,-728.86 ; S2.6@3821.39,-720.59 cw(c3813.12,-728.86) 3824.81,-728.86 ; 3824.81,-728.86 cw(c3836.5,-728.86) S2.6@3828.23,-720.59 ; 3824.81,-728.86 cw(c3836.5,-728.86) S2.6@3828.23,-720.59 ; 3824.81,-728.86 cw(c3836.5,-728.86) S2.6@3828.23,-720.59
  Bottom Layer w10: R141.2@3839.81,-787.48 v1(3839.81,-752.48) ; R141.2@3832.74,-780.41 ccw(c3815.67,-763.34) 3839.81,-763.34 ; R141.2@3832.74,-780.41 ccw(c3815.67,-763.34) 3839.81,-763.34 ; R141.2@3832.74,-780.41 ccw(c3815.67,-763.34) 3839.81,-763.34 ; v1@3835.92,-756.37 cw(c3826.53,-765.76) 3839.81,-765.76 ; v1@3835.92,-756.37 cw(c3826.53,-765.76) 3839.81,-765.76 ; v1@3835.92,-756.37 cw(c3826.53,-765.76) 3839.81,-765.76 ; 3839.81,-765.76 cw(c3853.09,-765.76) v1@3843.7,-756.37 ; 3839.81,-765.76 cw(c3853.09,-765.76) v1@3843.7,-756.37 ; 3839.81,-765.76 cw(c3853.09,-765.76) v1@3843.7,-756.37 ; 3839.81,-763.34 ccw(c3863.95,-763.34) R141.2@3846.88,-780.41 ; 3839.81,-763.34 ccw(c3863.95,-763.34) R141.2@3846.88,-780.41 ; 3839.81,-763.34 ccw(c3863.95,-763.34) R141.2@3846.88,-780.41
NetR142_2: R142.2 S2.7 | length 502.4
  Top Layer w10: S2.7@3874.81,-697.48 3874.81,-727.48 ; v1@3894.31,-752.48 ccw(c3881.03,-752.48) 3890.42,-743.09 ccw(c3899.81,-733.7) v1@3899.81,-746.98 ; v1(3899.81,-752.48) 3874.81,-727.48 ; S2.7@3871.72,-720.89 cw(c3866.25,-727.48) 3874.81,-727.48 ; S2.7@3871.72,-720.89 cw(c3866.25,-727.48) 3874.81,-727.48 ; S2.7@3871.72,-720.89 cw(c3866.25,-727.48) 3874.81,-727.48 ; S2.7@3871.72,-720.89 cw(c3866.25,-727.48) 3874.81,-727.48 ; S2.7@3871.72,-720.89 cw(c3866.25,-727.48) 3874.81,-727.48 ; 3874.81,-727.48 cw(c3883.37,-727.48) S2.7@3877.9,-720.89 ; 3874.81,-727.48 cw(c3883.37,-727.48) S2.7@3877.9,-720.89 ; 3874.81,-727.48 cw(c3883.37,-727.48) S2.7@3877.9,-720.89 ; 3874.81,-727.48 cw(c3883.37,-727.48) S2.7@3877.9,-720.89 ; 3874.81,-727.48 cw(c3883.37,-727.48) S2.7@3877.9,-720.89 ; S2.7@3879.65,-717.17 ccw(c3916.25,-717.17) 3890.37,-743.04 ; S2.7@3879.65,-717.17 ccw(c3916.25,-717.17) 3890.37,-743.04 ; S2.7@3879.65,-717.17 ccw(c3916.25,-717.17) 3890.37,-743.04 ; S2.7@3872.39,-721.36 cw(c3858.56,-745.31) 3885.28,-738.15 ccw(c3858.56,-745.31) S2.7@3872.39,-721.36
  Bottom Layer w10: R142.2@3899.81,-787.48 v1(3899.81,-752.48) ; R142.2@3892.74,-780.41 ccw(c3875.67,-763.34) 3899.81,-763.34 ; R142.2@3892.74,-780.41 ccw(c3875.67,-763.34) 3899.81,-763.34 ; R142.2@3892.74,-780.41 ccw(c3875.67,-763.34) 3899.81,-763.34 ; v1@3895.92,-756.37 cw(c3886.53,-765.76) 3899.81,-765.76 ; v1@3895.92,-756.37 cw(c3886.53,-765.76) 3899.81,-765.76 ; v1@3895.92,-756.37 cw(c3886.53,-765.76) 3899.81,-765.76 ; 3899.81,-765.76 cw(c3913.09,-765.76) v1@3903.7,-756.37 ; 3899.81,-765.76 cw(c3913.09,-765.76) v1@3903.7,-756.37 ; 3899.81,-765.76 cw(c3913.09,-765.76) v1@3903.7,-756.37 ; 3899.81,-763.34 ccw(c3923.95,-763.34) R142.2@3906.88,-780.41 ; 3899.81,-763.34 ccw(c3923.95,-763.34) R142.2@3906.88,-780.41 ; 3899.81,-763.34 ccw(c3923.95,-763.34) R142.2@3906.88,-780.41